# EAGLE board NOT (EAGLE 7.2.0)
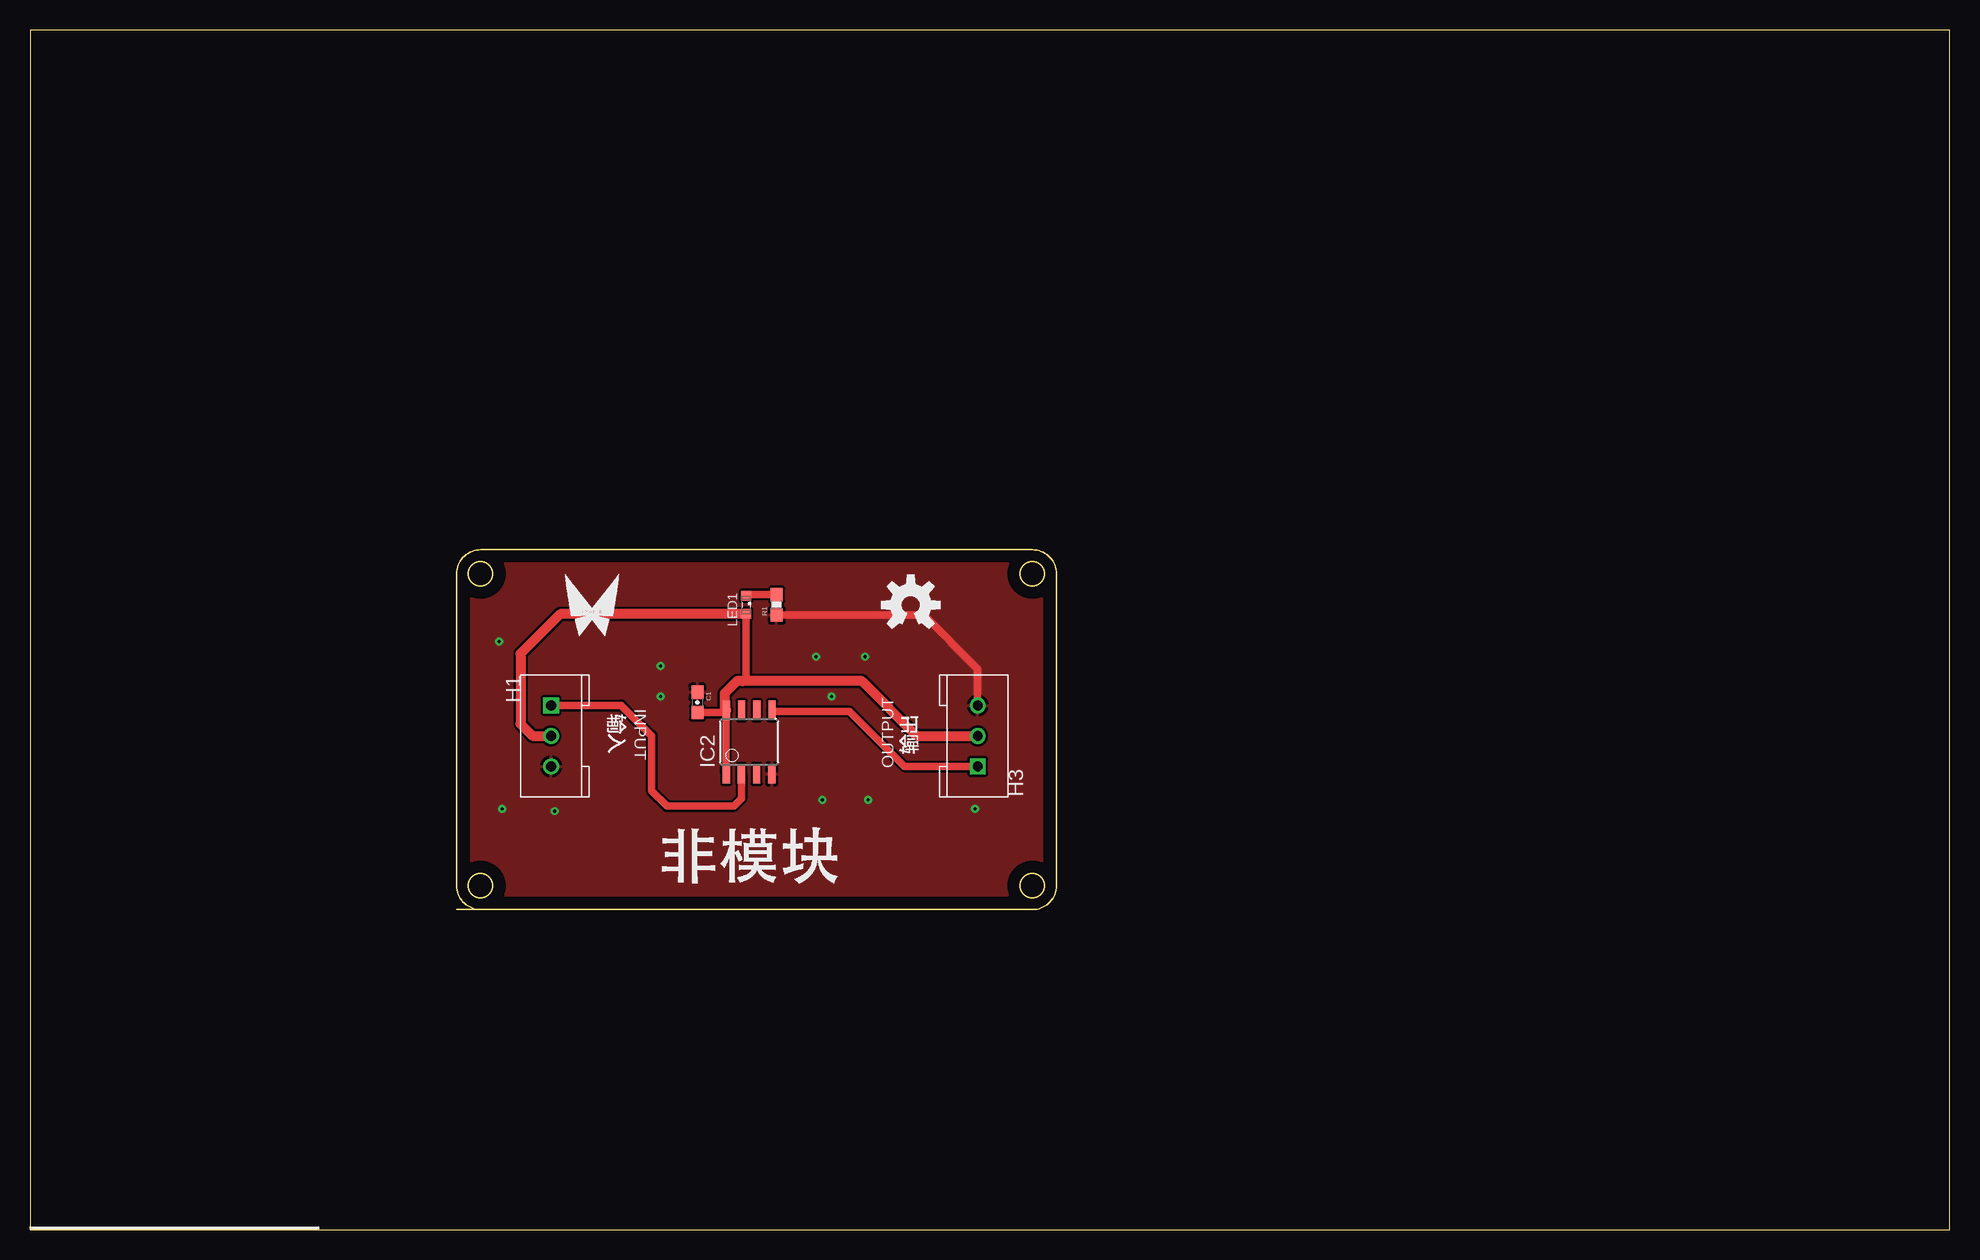
[diagram p0: board, top side]
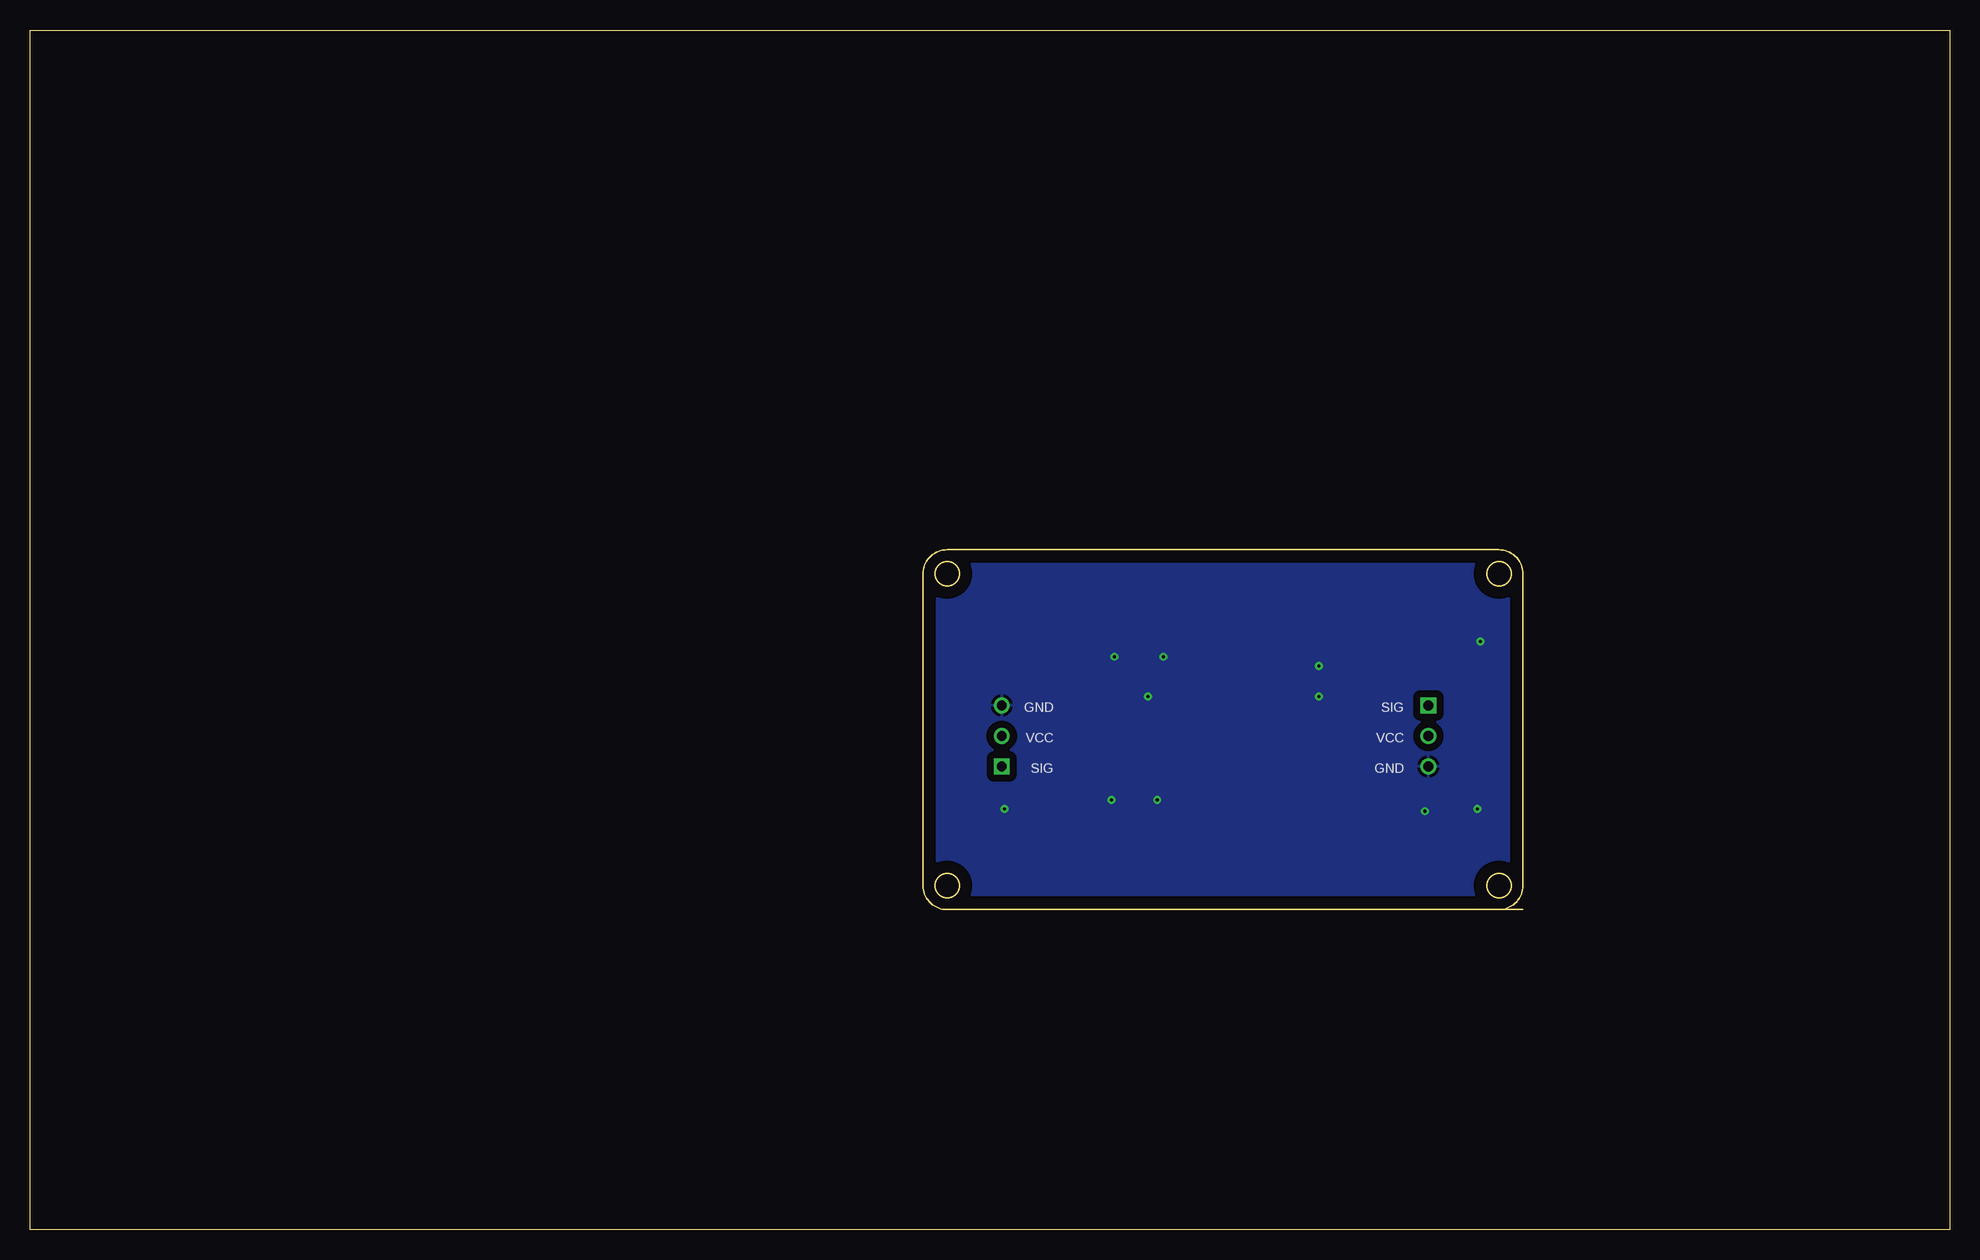
[diagram p1: board, bottom side, seen from below]

Size 160 x 100 mm. Coordinates in mm from the lower left corner, seen from the top.
Outline: 0,0 160,0 160,100 0,100 0,0
Copper layers (1*16): Top 0.035mm / dielectric 1.5mm / Bottom 0.035mm
Design rules "default": minimum track width 10mil, minimum drill 24mil, track to track 8mil, track to pad 8mil, pad to pad 8mil, via to via 8mil, smd to smd 8mil, copper to edge 40mil, drill to drill 8mil, minimum pad ring 10mil, minimum via ring 8mil, stop-mask expansion 4mil, vias tented up to drill 0mil, thermal gap 10mil

## Footprints (pad centres in the part's own frame; a part is rotated, then mirrored left to right if it is on the bottom)
0603-CAP = smd 1.1 x 1: 1 -0.85,0; 2 0.85,0
HEAD_LOCK = drill 0.8 square: 1 0,0 | drill 0.8: 2 2.54,0; 3 5.08,0
8S1 = smd 0.6 x 1.6: 1 -1.905,-2.654; 2 -0.645,-2.654; 3 0.625,-2.654; 4 1.895,-2.654; 5 1.905,2.654; 6 0.635,2.654; 7 -0.635,2.654; 8 -1.905,2.654
SML0603 = smd 0.8 x 0.8: A 0.75,0; C -0.75,0
0603-RES = smd 1.1 x 1: 1 -0.85,0; 2 0.85,0

## Placement (x,y rotation side)
C1  0.1uF  [0603-CAP]  55.63,43.94 270 top
H1  HEAD_LOCK  [HEAD_LOCK]  43.43,43.69 270 top
H3  HEAD_LOCK  [HEAD_LOCK]  78.99,38.61 90 top
IC2  TINY13-20SSU  [8S1]  59.94,40.64 0 top
LED1  [SML0603]  59.69,52.07 270 top
R1  [0603-RES]  62.23,52.07 90 top
U$1  DIMENSION1  [DIMENSION1]  35.56,26.67 0 top
U$2  [OSHW-LOGO-M]  73.41,52.07 0 top

## Library data of the parts
C1 = SparkFun-Capacitors; PROD_ID: CAP-00810
H1 H3 = HEAD_LOCK
IC2 = atmel; MPN: ATTINY13-20SSU; OC_FARNELL: 1455133; OC_NEWARK: 58M3771
LED1 = led
R1 = SparkFun-Passives
U$1 = Xmaker_yuhui
U$2 = SparkFun-Aesthetics

## Nets
5V: C1.2 H1.2 H3.2 IC2.1 IC2.8 LED1.A
GND: C1.1 H1.3 H3.3 IC2.4 R1.1
IN1: H1.1 IC2.2
N$1: LED1.C R1.2
OUT: H3.1 IC2.5

## Tracks (layer width: path | path; a pad name or v marks a point on that pad's centre or on a via)
5V
  Top 0.61: IC2.1 IC2.8 57.84,43.09 C1.2 | 59.44,45.72 59.69,45.97 LED1.A 59.68,51.31
  Top 0.813: IC2.8 57.91,43.42 57.91,44.7 58.93,45.72 59.44,45.72 69.34,45.72 73.91,41.15 H3.2 | 59.68,51.31 44.2,51.31 40.89,48.01 40.89,42.16 41.91,41.15 H1.2
GND  (via drill 0.25)
  Top 0.61: R1.1 74.51,51.22 78.99,46.74 H3.3
  other vias: 39.12,49.02 39.37,35.05 52.58,46.99 52.58,44.45 66.04,35.81 69.85,35.81 43.71,34.87 78.77,35.08 66.8,44.45 65.53,47.75 69.6,47.75
  pour Bottom (isolate 0.61): 33.27,57.91 89.15,57.91 89.15,23.88 33.27,23.88
  pour Top: 33.27,57.91 89.15,57.91 89.15,23.88 33.27,23.88
IN1
  Top 0.61: IC2.2 59.3,35.93 58.67,35.31 53.09,35.31 51.82,36.58 51.82,41.15 49.28,43.69 H1.1
N$1
  Top 0.61: R1.2 59.79,52.92 LED1.C
OUT
  Top 0.61: IC2.5 61.96,43.18 68.33,43.18 72.9,38.61 H3.1

## Text on the board
tPlace: INPUT | OUTPUT | C:/Users/Xiangzi/Desktop/Ãû³Æ/XMAKER_PCB3.bmp | C:/Users/Xiangzi/Desktop/Ãû³Æ/XMAKER_PCB3.bmp | C:/Users/Xiangzi/Desktop/Ãû³Æ/XMAKER_PCB3.bmp | C:/Users/Xiangzi/Desktop/Ãû³Æ/·ÇÄ£¿é.bmp | C:/Users/Xiangzi/Desktop/Ãû³Æ/·ÇÄ£¿é.bmp | C:/Users/Xiangzi/Desktop/Ãû³Æ/Êä³ö.bmp | C:/Users/Xiangzi/Desktop/Ãû³Æ/ÊäÈë.bmp
bPlace: SIG | GND | VCC | VCC | GND | SIG